# Allegro board DA_CONVERTER.brd
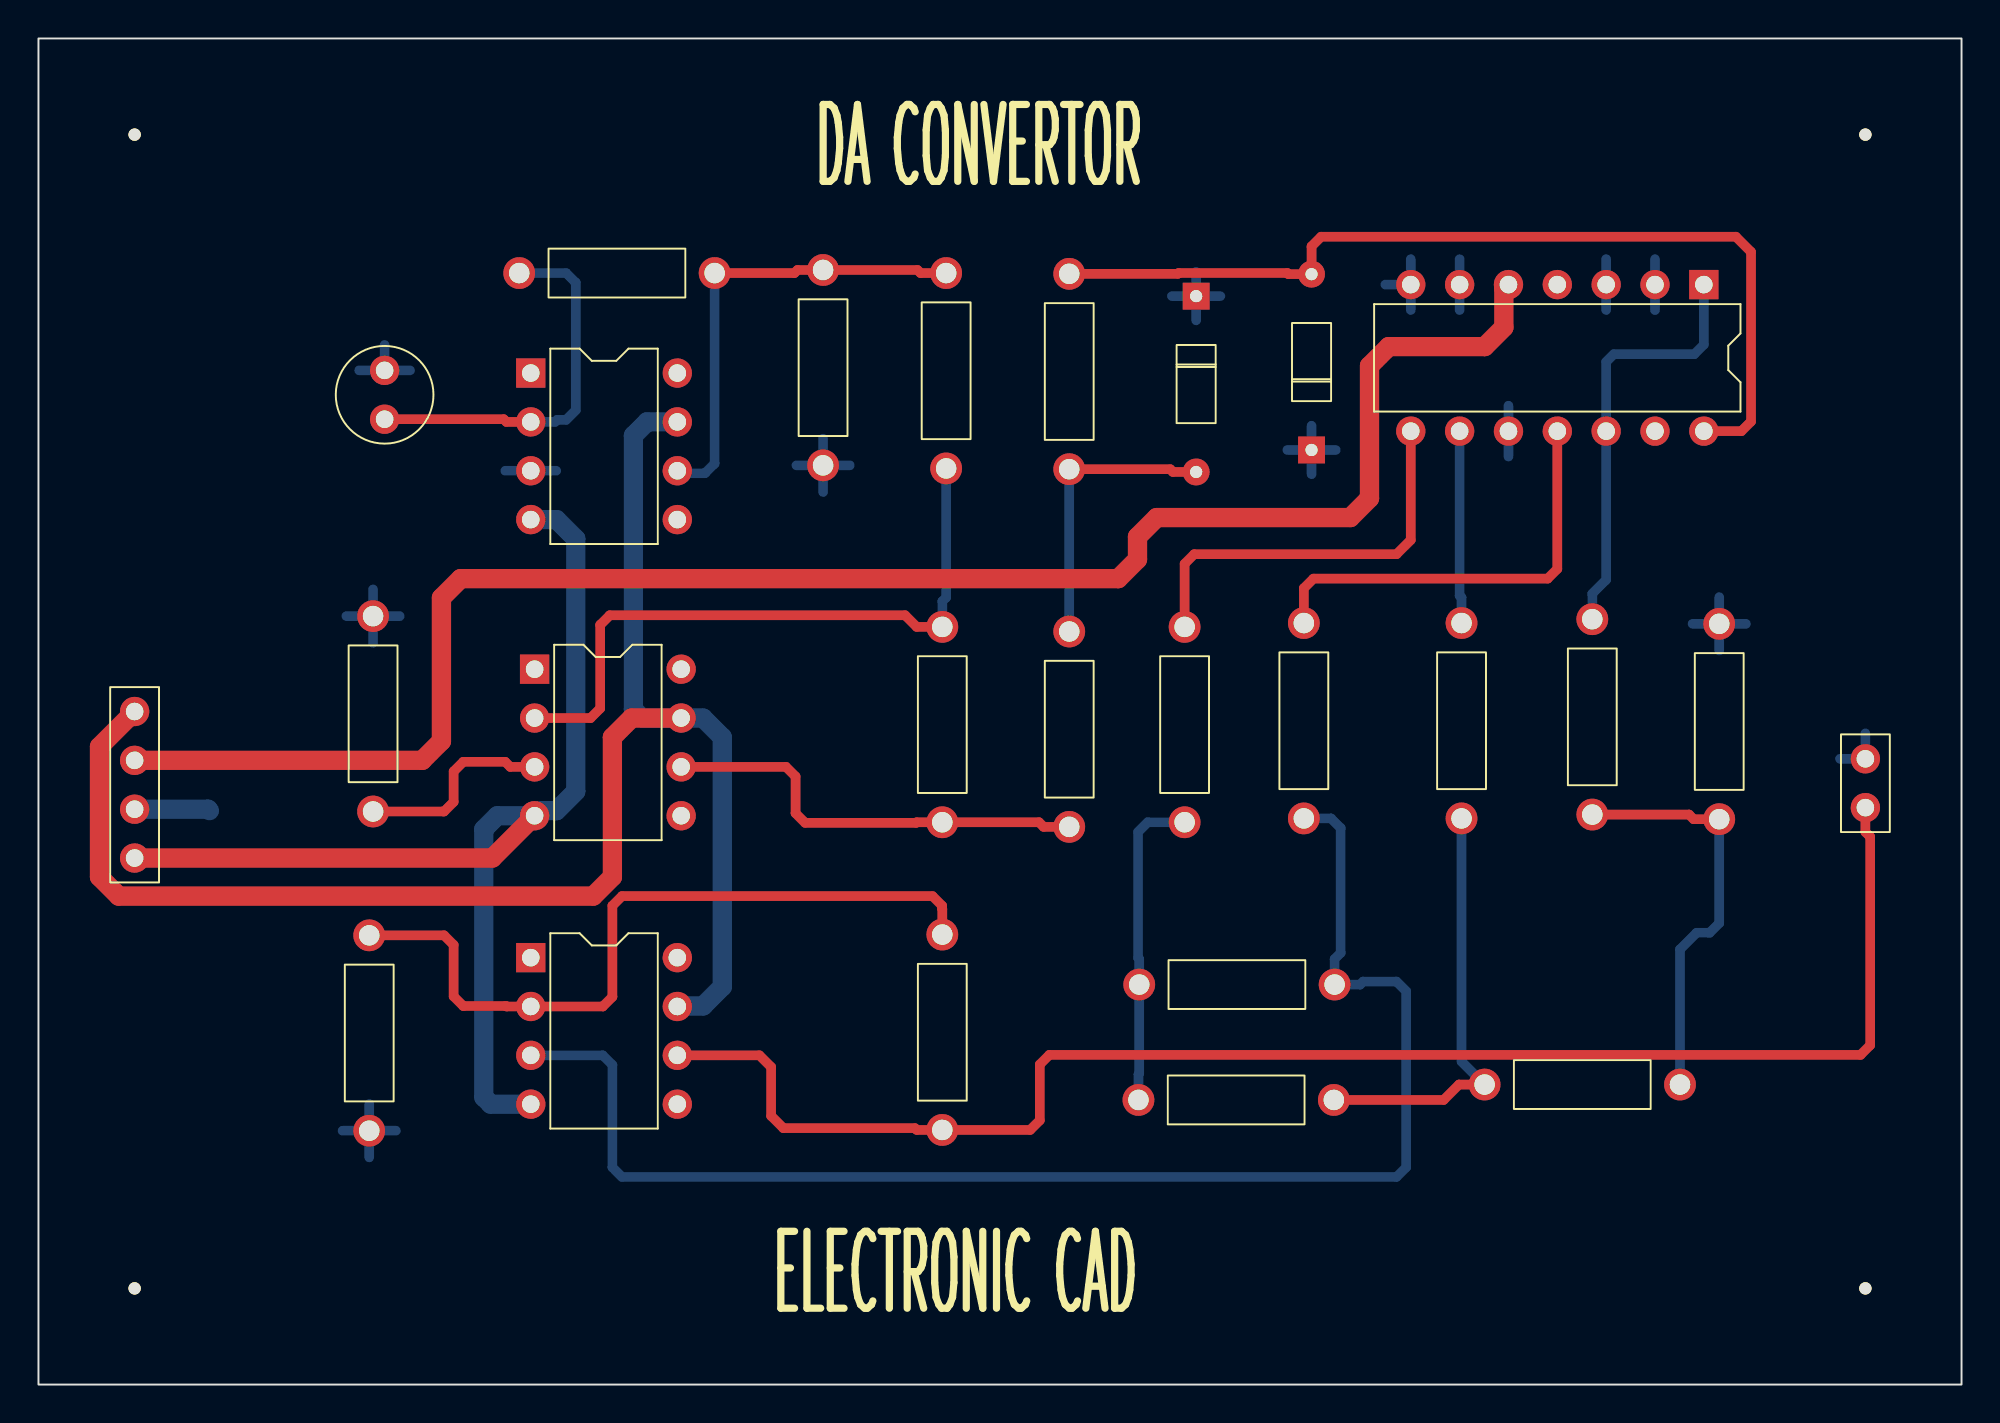
[diagram p0: board, top side]
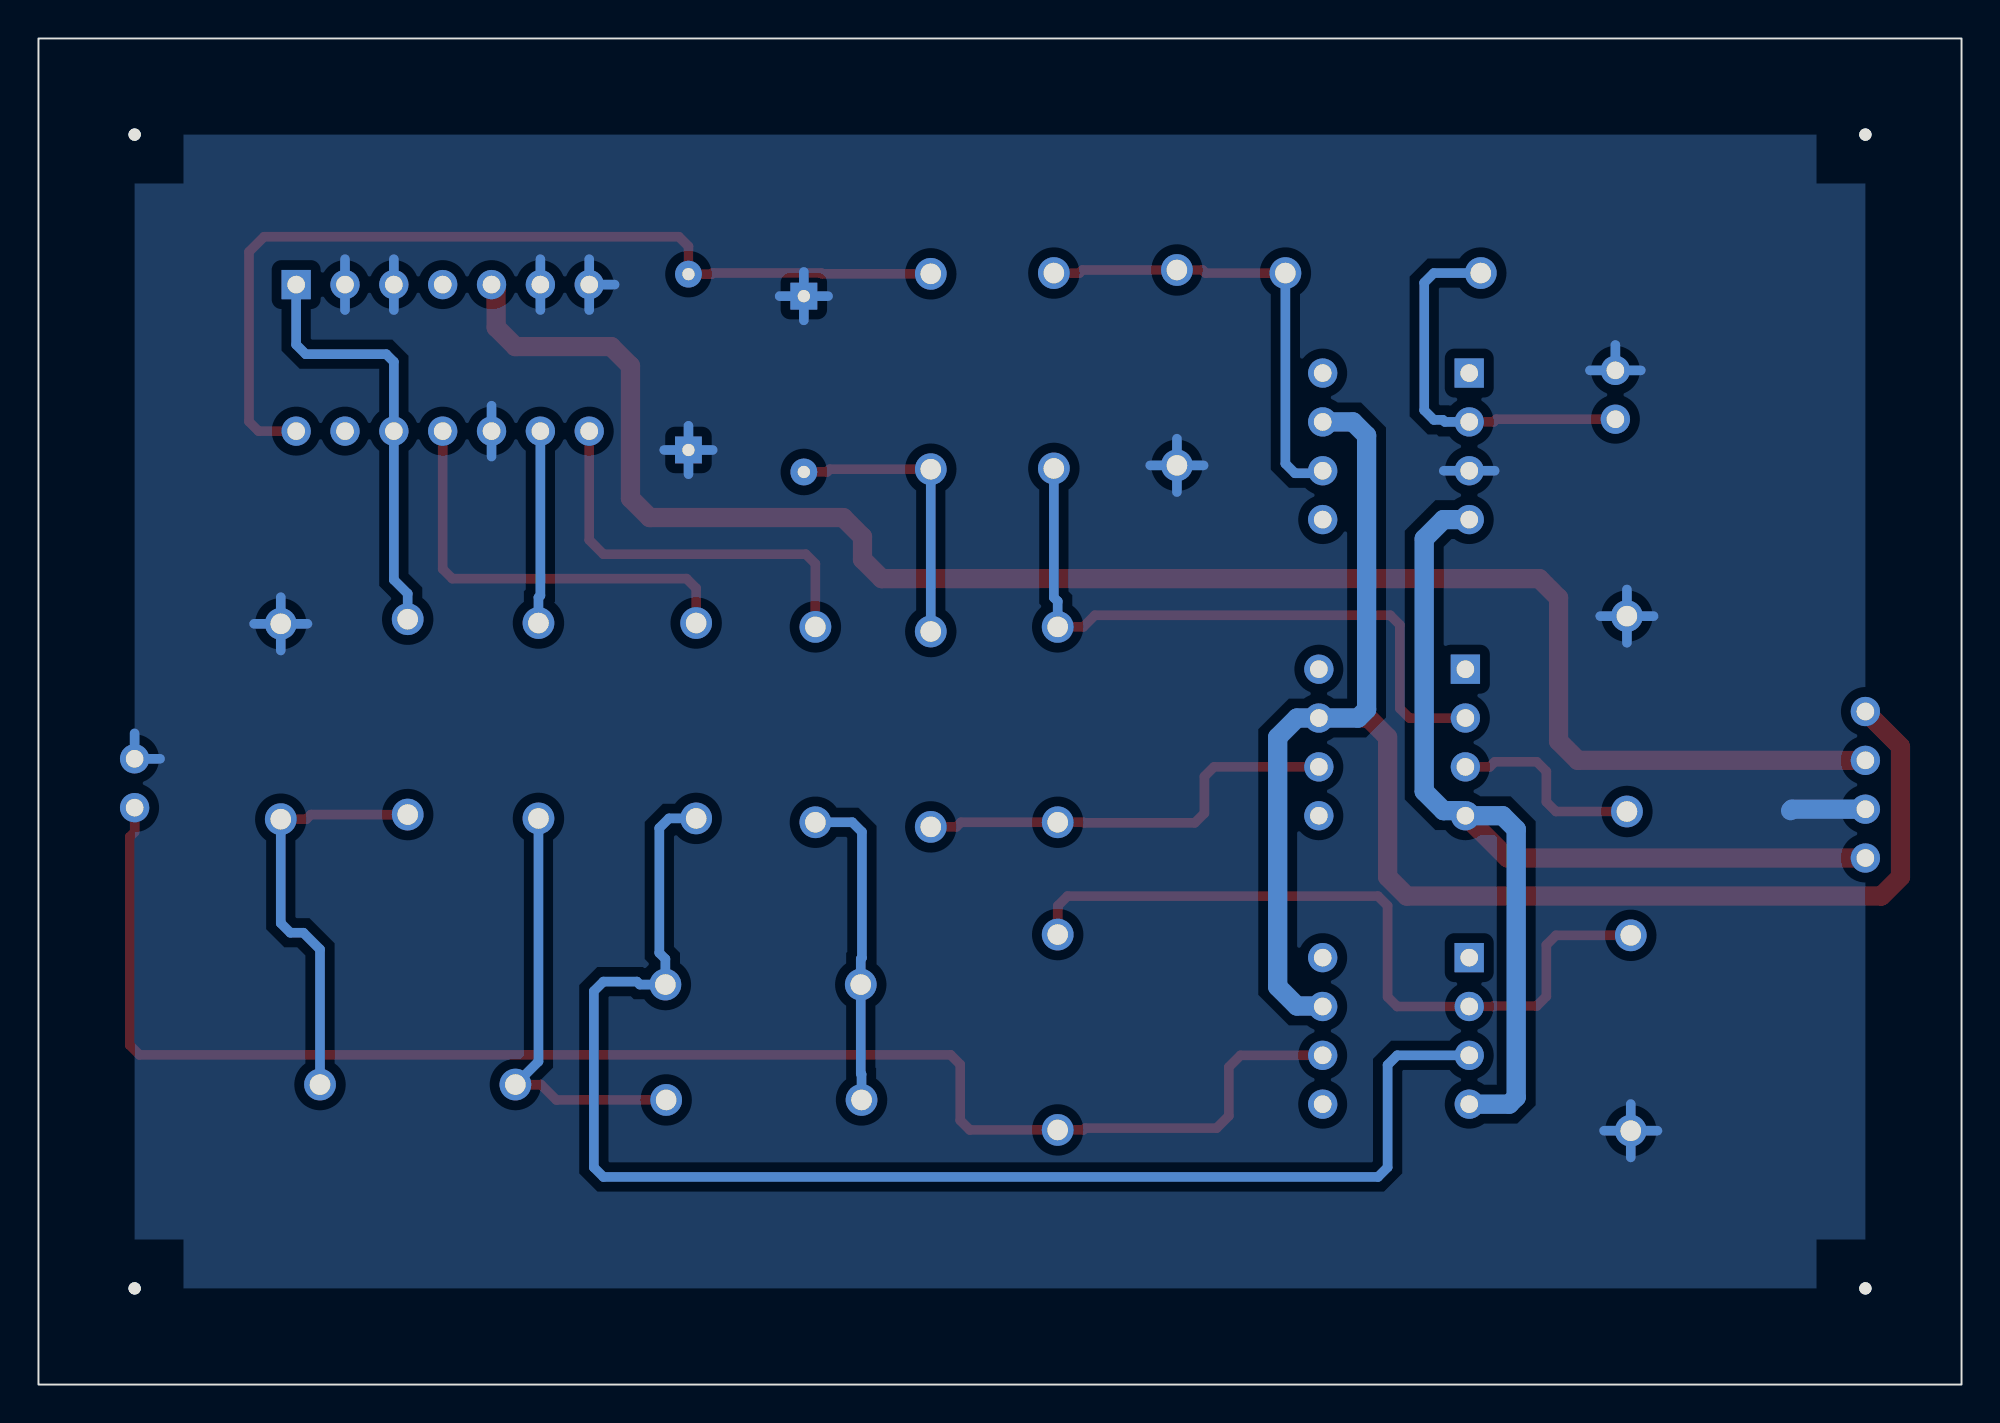
[diagram p1: board, bottom side, seen from below]

Outline 100 x 70 mm; copper layers: TOP, BOTTOM. Coordinates in mm from the lower left corner of the outline.
Outline path: rectangle 0,0 100,70

## Design rules (mm)
constraint set DEFAULT: min track width 0.5
nets with their own width: min track width 1; nets +5V +12V -12V GND

## Placement (name value [footprint] x y rotation side)
C1  0.01uF  [CAP196]  18 50.2 0 top
D1  D1N4148  [DO35]  60.2 56.6 180 top
D2  D1N4148  [DO35]  66.2 48.6 0 top
J1  CON4  [JUMPER4]  5 35 270 top
J2  CON2  [JUMPER2]  95 30 90 top
NOREF  -  [unnamed]  5 65 0 top
NOREF#2  -  [#2]  100 0 90 top
NOREF#3  -  [unnamed]  95 65 0 top
NOREF#4  -  [#2]  0 70 0 top
NOREF#5  -  [unnamed]  5 5 0 top
NOREF#6  -  [unnamed]  95 5 0 top
R1  10k  [RES400]  25 57.8 270 top
R2  6.8k  [RES400]  40.8 47.8 0 top
R3  10k  [RES400]  17.4 29.8 0 top
R4  10k  [RES400]  47.2 57.8 180 top
R5  5.1k  [RES400]  47 39.4 180 top
R6  1k  [RES400]  53.6 29 0 top
R7  1k  [RES400]  53.6 47.6 0 top
R8  10k  [RES400]  67.4 20.8 90 top
R9  10k  [RES400]  57.2 14.8 270 top
R10  10k  [RES400]  75.2 15.6 270 top
R11  10k  [RES400]  87.4 29.4 0 top
R12  22k  [RES400]  65.8 39.6 180 top
R13  22k  [RES400]  59.6 39.4 180 top
R14  22k  [RES400]  74 39.6 180 top
R15  22k  [RES400]  80.8 39.8 180 top
R16  22k  [RES400]  47 23.4 180 top
R17  10k  [RES400]  17.2 13.2 0 top
U1  LM741  [DIP8_3]  25.6 52.6 0 top
U4  74LS90  [DIP14_3]  86.6 57.2 270 top
U5  LM741  [DIP8_3]  25.8 37.2 0 top
U6  LM741  [DIP8_3]  25.6 22.2 0 top

## Library data of the parts
C1 = CAP NP: Tolerance: ***; User Part Number: ***
D1 D2 = 1N4148
J1 = CON4: User Part Number: ***
J2 = CON2: User Part Number: ***
R1-R17 = R: Tolerance: ***; User Part Number: ***
U1 U5 U6 = LM741: Tolerance: ***; User Part Number: ***
U4 = 74LS90: Tolerance: ***; User Part Number: ***

## Footprints (pads in the part's own frame, mm; a bottom-side part is the same pattern mirrored in y, then rotated)
CAP196
  round 1.524 hole 0.914: 1(0,0) 2(0,2.54)
DIP8_3
  rect 1.524x1.524 hole 0.914: 1(0,0)
  round 1.524 hole 0.914: 2(0,-2.54) 3(0,-5.08) 4(0,-7.62) 5(7.62,-7.62) 6(7.62,-5.08) 7(7.62,-2.54) 8(7.62,0)
DIP14_3
  rect 1.524x1.524 hole 0.914: 1(0,0)
  round 1.524 hole 0.914: 2(0,-2.54) 3(0,-5.08) 4(0,-7.62) 5(0,-10.16) 6(0,-12.7) 7(0,-15.24) 8(7.62,-15.24) 9(7.62,-12.7) 10(7.62,-10.16) 11(7.62,-7.62) 12(7.62,-5.08) 13(7.62,-2.54) 14(7.62,0)
DO35
  rect 1.397x1.397 hole 0.635: 1(0,0)
  round 1.397 hole 0.635: 2(0,9.144)
JUMPER2
  round 1.524 hole 0.914: 1(0,0) 2(2.54,0)
JUMPER4
  round 1.524 hole 0.914: 1(0,0) 2(2.54,0) 3(5.08,0) 4(7.62,0)
RES400
  round 1.651 hole 1.067: 1(0,0) 2(0,10.16)
unnamed
  round 0.635 hole 3.175 unplated: (0,0)

## Nets
+5V: J1.2 U4.5
+12V: J1.1 U1.7 U5.7 U6.7
-12V: J1.4 U1.4(V-) U5.4(V-) U6.4(V-)
GND: C1.2 D1.1 D2.1 J1.3 J2.2 R2.1 R3.2 R11.2 R17.1 U1.3 U4.2 U4.3 U4.6 U4.7(R92) U4.10
CLK: D2.2 R7.2 U4.14
OUT: J2.1 R16.2 U6.6
SIG: R8.1 R12.2 U6.3
N00156: C1.1 R1.1 U1.2
N00165: R1.2 R2.2 R4.1 U1.6
N00576: R3.1 U5.3
N00687: R4.2 R5.1 U5.2
N00856: R5.2 R6.1 U5.6
N00858: D1.2 R6.2 R7.1
N01419: R15.1 U4.1 U4.12
N01467: R14.1 U4.9
N01546: R13.1 U4.8
N01569: R12.1 U4.11
N02242: R8.2 R9.1 R13.2
N02247: R9.2 R10.1 R14.2
N02254: R10.2 R11.1 R15.2
N02873: R16.1 R17.2 U6.2

Pads without a net: U1 1 5 8; U4 4 13; U5 1 5 8; U6 1 5 8

## Routing (per net, layer and track width the routed paths; a pad name or vN(x,y) marks a point on that pad's centre or on a via; arc(x,y) is an arc through that point)
+5V: length 91.9
  TOP w1: U4.5 76.2,56.96 76.2,54.98 75.2,53.98 70.22,53.98 69.22,52.98 69.22,46.09 68.22,45.09 58.15,45.09 57.15,44.09 57.15,42.91 56.15,41.91 21.95,41.91 20.95,40.91 20.95,33.46 19.95,32.46 J1.2
+12V: length 85.9
  TOP w1: J1.1 3.17,33.17 3.17,26.4 4.17,25.4 28.84,25.4 29.84,26.4 29.84,33.66 30.84,34.66 U5.7
  BOTTOM w1: U6.7 33.24,19.68 34.56,19.68 35.56,20.68 35.56,33.66 34.56,34.66 U5.7 31.38,34.66 30.94,35.1 30.94,49.35 31.64,50.06 U1.7
-12V: length 59.7
  TOP w1: U5.4 23.6,27.38 J1.4
  BOTTOM w1: U6.4 23.52,14.58 23.16,14.94 23.16,28.87 23.86,29.58 U5.4 26.07,29.84 26.94,29.84 27.94,30.84 27.94,43.98 26.94,44.98 U1.4
GND: length 60
  BOTTOM w0.5: 81.52,55.88 U4.3 81.52,58.52 ; 24.28,47.52 U1.3 26.92,47.52 ; 16.68,52.74 C1.2 ; C1.2 18,54.06 ; C1.2 19.32,52.74 ; D1.1 60.2,57.86 ; D1.1 60.2,55.34 ; D1.1 61.46,56.6 ; D1.1 58.94,56.6 ; R2.1 42.19,47.8 ; R2.1 40.8,49.19 ; R2.1 40.8,46.41 ; R2.1 39.41,47.8 ; 17.2,11.81 R17.1 ; R17.1 17.2,14.59 ; R17.1 15.81,13.2 ; R17.1 18.59,13.2 ; 70.04,57.2 U4.7 ; U4.7 71.36,55.88 ; U4.7 71.36,58.52 ; R3.2 17.4,41.35 ; R3.2 17.4,38.57 ; R3.2 16.01,39.96 ; R3.2 18.79,39.96 ; 64.94,48.6 D2.1 ; D2.1 66.2,47.34 ; D2.1 67.46,48.6 ; D2.1 66.2,49.86 ; 84.06,55.88 U4.2 84.06,58.52 ; 73.9,58.52 U4.6 73.9,55.88 ; 93.68,32.54 J2.2 95,33.86 ; R11.2 87.4,40.95 ; R11.2 86.01,39.56 ; R11.2 87.4,38.17 ; R11.2 88.79,39.56 ; 76.44,50.9 U4.10 76.44,48.26
  BOTTOM w1: J1.3 8.81,29.92 8.89,29.84
CLK: length 49
  TOP w0.5: R7.2 59.25,57.76 59.29,57.8 64.94,57.8 65,57.74 D2.2 66.2,59.19 66.7,59.69 88.27,59.69 89.05,58.9 89.05,50.08 88.55,49.58 U4.14
OUT: length 81.1
  TOP w0.5: J2.1 95,28.73 95.25,28.48 95.25,17.64 94.75,17.14 52.57,17.14 52.07,16.64 52.07,13.74 51.57,13.24 R16.2 45.67,13.24 45.58,13.34 38.73,13.34 38.1,13.97 38.1,16.51 37.49,17.12 U6.6
SIG: length 75
  BOTTOM w0.5: R12.2 67.22,29.44 67.72,28.94 67.72,22.45 67.4,22.13 R8.1 68.73,20.8 68.89,20.95 70.62,20.95 71.12,20.45 71.12,11.29 70.62,10.79 30.34,10.79 29.84,11.29 29.84,16.62 29.34,17.12 U6.3
N00156: length 20
  TOP w0.5: U1.2 24.33,50.06 24.19,50.2 C1.1
  BOTTOM w0.5: U1.2 26.87,50.06 26.97,50.16 27.44,50.16 27.94,50.66 27.94,57.3 27.44,57.8 R1.1
N00165: length 24.3
  TOP w0.5: R4.1 45.87,57.8 45.71,57.96 R2.2 39.47,57.96 39.31,57.8 R1.2
  BOTTOM w0.5: U1.6 33.35,47.39 34.66,47.39 35.16,47.89 R1.2
N00576: length 10.5
  TOP w0.5: R3.1 21.09,29.8 21.59,30.3 21.59,31.89 22.09,32.38 24.27,32.38 24.53,32.12 U5.3
N00687: length 34.5
  TOP w0.5: U5.2 28.71,34.66 29.21,35.16 29.21,39.51 29.71,40.01 45.06,40.01 45.67,39.4 R5.1
  BOTTOM w0.5: R4.2 47.2,40.93 47,40.73 R5.1
N00856: length 22.6
  TOP w0.5: R6.1 52.27,29 52.03,29.24 R5.2 45.67,29.24 45.64,29.21 39.87,29.21 39.37,29.71 39.37,31.62 38.87,32.12 U5.6
N00858: length 15.1
  TOP w0.5: R7.1 58.85,47.6 59,47.46 D1.2
  BOTTOM w0.5: R7.1 R6.2
N01419: length 22.3
  BOTTOM w0.5: R15.1 80.8,41.13 81.52,41.85 U4.12 81.52,53.19 81.92,53.58 86.1,53.58 86.6,54.08 U4.1
N01467: length 10
  BOTTOM w0.5: R14.1 74,40.93 73.9,41.03 U4.9
N01546: length 21.2
  TOP w0.5: U4.8 71.36,43.92 70.62,43.18 60.1,43.18 59.6,42.68 R13.1
N01569: length 22.6
  TOP w0.5: R12.1 65.8,41.41 66.3,41.91 78.48,41.91 78.98,42.41 U4.11
N02242: length 16.6
  BOTTOM w0.5: R13.2 57.68,29.24 57.18,28.74 57.18,22.19 57.24,22.13 R8.2 57.24,16.17 57.2,16.13 R9.1
N02247: length 22.5
  TOP w0.5: R9.2 73.07,14.8 73.87,15.6 R10.1
  BOTTOM w0.5: R10.1 74,16.8 R14.2
N02254: length 21.7
  TOP w0.5: R15.2 85.83,29.64 86.07,29.4 R11.1
  BOTTOM w0.5: R11.1 87.4,24 86.9,23.5 86.22,23.5 85.36,22.63 R10.2
N02873: length 39.8
  TOP w0.5: R16.1 47,24.73 46.99,24.74 46.99,24.9 46.49,25.4 30.34,25.4 29.84,24.9 29.84,20.16 29.34,19.66 U6.2 24.33,19.66 24.31,19.68 22.09,19.68 21.59,20.18 21.59,22.86 21.09,23.36 R17.2

## Copper pours and planes (outline as drawn; the poured copper is in the pictures)
GND on BOTTOM: 95,5 95,65 5,65 5,5 ; 5 cut-outs

## Text on the board
Ref Des/Silkscreen Top: ELECTRONIC CAD | DA CONVERTOR
DIMENSION: FIGURE | FINISHED_SIZE | 0.635 | 0.914 | 1.067 | 3.175 | DRILL CHART: TOP to BOTTOM | ALL UNITS ARE IN MILLIMETERS | PLATED | NON-PLATED | QTY | 4 | 46 | 34
